# Altium PCB Z1.PcbDoc (part 2 of 2)
Units mm, origin at the board's own origin, x right, y up, seen from the top; angles counter-clockwise.
Board outline 56.7 x 34.49 mm, 4 copper layers (Top Layer, MidLayer1, MidLayer2, Bottom Layer), stack 1 mm thick; 106 components, 129 nets, 520 pads, 189 vias.
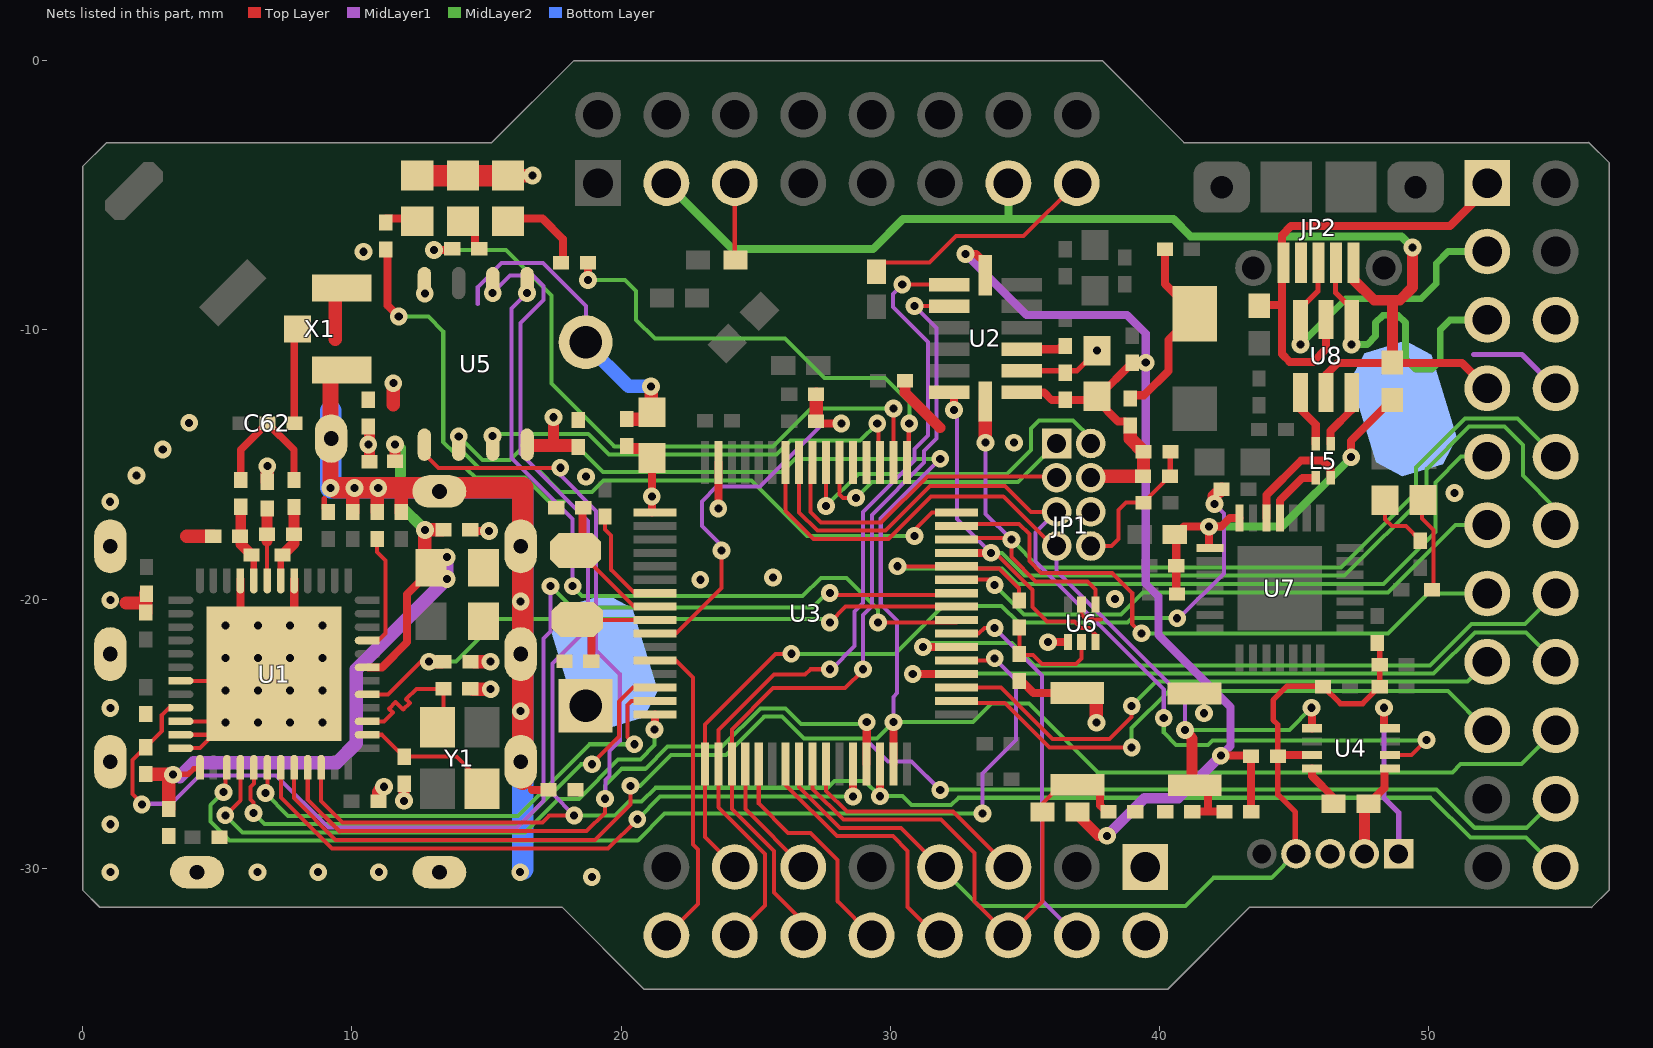
[diagram p4: the nets of this part, all layers, seen from the top]

## Via types
v1: diameter 0.66, hole 0.3, Top Layer to Bottom Layer, 171 vias
v2: diameter 0.66, hole 0.3, Top Layer to Bottom Layer, tented top, 17 vias
v3: diameter 0.66, hole 0.3, Top Layer to Bottom Layer, tented bottom, 1 vias

## Nets (pads, with @x,y where several pads share a name; then routed paths per layer and width w, separated by ;. In a path a pad name is that pad's centre, name@x,y a point inside that pad or via, vN(x,y) a via of type N, cw(c..) or ccw(c..) an arc to the next point about the centre after c; other vN are vias at no path point) (continued)
D+3V: BT1.1 C2.2 C3.2 C9.2 C14.2 C16.1 C24.1 C25.1 C26.1 C28.2 DS1.1 DS2.1 DS3.1 JP1.22 JP1.40 JP1.56 JP1.63 JP1.68 L2.1 L3.2 L10.2 R2.1 R9.2 R13.1 U2.1 U2.7 U3.1 U4.1 U5.8 | length 64.8
  Top Layer w0.3: C25.1@20.79,-14.408 C25.1@21.14,-14.758 v1(21.14,-16.188) U3.1@21.14,-16.778 ; v1(32.79,-7.178) 33.18,-7.178 33.527,-7.525 U2.7@33.527,-7.976 ; U2.1@34.87,-12.318 35.7,-12.318 35.993,-12.611 36.5,-12.611 C2.2@37.289,-12.611 ; C2.2@37.67,-12.61 38.456,-13.396 L3.2@38.719,-13.396 ; C2.2@37.701,-12.5 L10.2@38.983,-11.218 ; v1(42.27,-25.812) R13.1@43.367,-25.812 ; R13.1@43.39,-25.835 43.39,-27.877 R9.2@43.4,-27.887 ; C28.2@47.75,-27.6 48.34,-27.01 U4.1@48.34,-26.303
  Top Layer w0.4: C14.2@10.6,-13.592 10.65,-13.642 10.65,-14.255 L2.1@10.65,-14.9 ; 17.492,-14.28 v1(17.492,-13.244) ; C26.1@20.332,-14.408 C25.1@20.79,-14.408 ; R2.1@37.04,-27.9 37.04,-28.098 37.73,-28.788 v1(38.04,-28.788) ; JP1.56@47.6,-29.458 47.6,-27.977
  Top Layer w0.5: DS3.1@15.8,-4.268 v1(16.71,-4.268) ; U5.8@16.51,-14.293 C9.2@18.4,-14.293 ; JP1.68@18.36,-24.343 JP1.68@18.69,-24.013 ; JP1.63@37.528,-15.432 C16.1@39.382,-15.432 ; C2.2@37.631,-12.571 C2.2@37.701,-12.5 ; L3.2@38.913,-13.548 38.913,-14.047 C24.1@39.398,-14.532 C16.1@39.398,-15.426
  Top Layer w0.8: DS1.1@12.966,-4.268 DS2.1@14.13,-4.268 DS3.1@15.8,-4.268
  MidLayer1 w0.3: v1(32.79,-7.178) 35.054,-9.442 38.784,-9.442 39.48,-10.138 v1(39.48,-11.218) 39.48,-19.428 39.96,-19.908 39.96,-21.334 42.627,-24.001 42.627,-25.455 v1(42.27,-25.812)
  MidLayer1 w0.4: v1(38.04,-28.788) 39.433,-27.395 40.687,-27.395 v1(42.27,-25.812)
  MidLayer2 w0.15: 14.28,-15.178 14.587,-15.485 16.43,-15.485 17.323,-16.378 17.88,-16.378
  other v1: 10.611,-14.255
D_N: JP1.21 JP2.2 U8.1 | length 12.2
  Top Layer w0.2: JP2.2@46.53,-7.448 46.53,-7.5 46.53,-8.614 47.12,-9.204 47.12,-9.618 v1(47.12,-10.538)
  MidLayer2 w0.254: v1(47.12,-10.538) 47.708,-10.538 48.018,-10.228 48.018,-9.724 48.283,-9.459 48.85,-9.459 49.122,-9.731 49.122,-11.079 49.493,-11.45 50.111,-11.45 50.42,-11.141 50.42,-9.979 50.771,-9.628 JP1.21@52.16,-9.628
D_P: JP1.19 JP2.3 U8.3 | length 12.2
  Top Layer w0.2: v1(45.23,-10.538) U8.3@45.23,-9.618 45.23,-9.214 45.88,-8.564 45.88,-7.5 JP2.3@45.88,-7.448
  MidLayer2 w0.254: v1(45.23,-10.538) 46.924,-8.844 49.709,-8.844 50.269,-8.284 50.269,-7.527 50.708,-7.088 JP1.19@52.16,-7.088
DGND: BT1.2 C1.2 C2.1 C3.1 C7.1 C8.1 C9.1 C14.1 C16.2 C20.2 C21.2 C24.2 C25.2 C26.2 C28.1 JP1.24 JP1.39 JP1.57 JP1.67 JP1.69 L7.1 L8.2 L9.2 S1.2 S2.2 U2.2 U3.63 U4.8 U5.4 U6.2 U6.4 | length 35.4
  Top Layer w0.15: U6.2@37.1,-20.199 37.1,-20.578 37.27,-20.748 37.81,-20.748 ; JP1.67@37.44,-18.028 38.21,-18.028 38.469,-17.769 38.469,-16.694 38.75,-16.413 L9.2@39.4,-16.413 40.156,-15.657 C16.2@40.156,-15.568 ; C16.2@40.398,-15.416 C16.2@40.456,-15.432
  Top Layer w0.2: U2.2@34.87,-11.518 36.5,-11.518 36.92,-11.518 v1(37.67,-10.768) ; C16.2@40.398,-15.416 C24.2@40.398,-14.532
  Top Layer w0.3: v1(23.61,-16.638) U3.63@23.61,-14.929 ; C21.2@34.861,-23.029 35.317,-23.485 S1.2@36.937,-23.485 ; v1(35.85,-21.596) U6.4@36.575,-21.596 ; U4.8@45.65,-26.293 45.65,-26.564 C28.1@46.442,-27.356
  Top Layer w0.4: L8.2@30.54,-11.895 30.54,-12.338 31.84,-13.638
  Top Layer w0.5: 11.54,-12.784 v1(11.54,-11.978) ; C26.2@20.24,-13.316 20.882,-13.316 C25.2@21.11,-13.088 ; C25.2@21.11,-13.058 v2(21.11,-12.098) ; S1.2@37.64,-23.532 37.65,-23.542 v1@37.65,-24.518
  MidLayer1 w0.15: 14.675,-9.046 14.675,-8.403 15.56,-7.518 17.09,-7.518 18.69,-9.118 18.69,-10.458 JP1.69@18.69,-10.513
  MidLayer1 w0.2: 51.658,-10.916 53.448,-10.916 JP1.24@54.7,-12.168
  Bottom Layer w0.5: JP1.69@18.69,-10.513 20.275,-12.098 v2(21.11,-12.098)
  other v1: 18.91,-30.318 37.65,-24.588 41.64,-24.238 38.34,-19.998 22.94,-19.278 25.64,-19.198 50.947,-16.058 18.69,-15.452 34.59,-14.188 12.709,-8.65
DP+5V: C17.1 C18.1 C19.1 L4.2 U7.7 U7.8 | length 14.7
  Top Layer w0.3: C17.1@40.614,-19.808 40.614,-17.598 40.904,-17.308 v1(41.83,-17.308) ; U7.8@41.83,-18.092 v1(41.83,-17.308) ; U7.7@42.96,-16.992 42.6,-16.992 42.285,-17.308 v1(41.83,-17.308) ; v1@47.096,-14.733 47.096,-14.122 L4.2@48.64,-12.578
  MidLayer2 w0.3: v1(41.83,-17.308) 44.541,-17.308 v1@47.121,-14.728
  other v1: 47.11,-14.727
DRF+3V: C13.1 C251.1 C431.2 L2.2 R5.1 U1.25 U1.43 | length 28.8
  Top Layer w0.2: v1@3.359,-26.498 3.93,-26.498 4.128,-26.3 U1.25@4.36,-26.3
  Top Layer w0.3: U1.43@10.625,-22.535 11.113,-22.535 12.05,-21.598 12.05,-19.818 C431.2@12.597,-19.271
  Top Layer w0.4: L2.2@11.6,-14.887 v1(11.6,-14.255)
  Top Layer w0.5: R5.1@2.341,-26.498 3.359,-26.498 3.2,-26.657 C251.1@3.2,-27.79 ; C431.2@12.712,-18.232 12.712,-17.418 C13.1@13.362,-17.418
  MidLayer1 w0.5: v1@3.61,-26.59 4.127,-26.073 9.44,-26.073 10.17,-25.343 10.17,-22.609 v1(13.526,-19.253) v1@13.526,-18.584
  MidLayer2 w0.4: v1@11.6,-14.192 11.802,-14.394 11.8,-16.516 v1(12.712,-17.428)
  other v1: 3.359,-26.517 13.526,-18.442
DRFGND: C11.1 C13.2 C42.2 C71.2 C81.1 C101.1 C171.2 C251.2 C261.2 C351.2 C371.2 C381.2 C391.2 C431.1 C441.2 C481.2 L7.2 pad.0 R1.1 R451.2 U1.0 U1.5 U1.9 U1.19 U1.22 U1.23 U1.24 X1.2 | length 66.6
  Top Layer w0.15: U1.24@3.785,-25.535 4.362,-25.535 4.721,-25.176 U1.0@4.721,-25.035 ; U1.23@3.785,-25.035 U1.0@4.721,-25.035 ; U1.22@3.785,-24.535 U1.0@5.261,-24.535 ; U1.19@3.785,-23.035 4.961,-23.035 v2(5.31,-23.385) ; v2(5.31,-24.585) 4.861,-25.035 U1.0@4.721,-25.035 ; U1.0@5.42,-24.528 U1.0@5.47,-24.578 ; U1.0@5.86,-20.665 U1.0@5.868,-20.673
  Top Layer w0.154: U1.0@7.86,-20.477 U1.0@7.867,-20.484
  Top Layer w0.2: C481.2@8.978,-16.62 8.978,-16.263
  Top Layer w0.3: U1.0@5.86,-20.665 U1.9@5.86,-19.27 ; U1.0@7.86,-20.477 U1.5@7.86,-19.27 ; C13.2@14.362,-17.468 v1(15.09,-17.468) ; 16.683,-27.08 L7.2@17.3,-27.08
  Top Layer w0.4: v1(11.941,-27.488) C381.2@11.941,-26.852
  Top Layer w0.5: 1.626,-20.142 2.34,-20.142 ; C101.1@2.34,-20.5 2.34,-20.142 ; C351.2@2.34,-19.8 2.34,-20.142 ; 3.862,-17.66 C81.1@4.852,-17.66 ; C71.2@6.86,-15.638 v1@6.86,-15.06 ; 9.38,-10.348 9.38,-8.684 X1.2@9.625,-8.439 ; C171.2@10.032,-16.768 v1@10.032,-15.88 ; R451.2@10.936,-16.76 10.936,-15.972 v1@10.94,-15.968 ; C371.2@10.992,-27.498 10.992,-27.162 v1(11.189,-26.965) ; C441.2@11.841,-16.768 11.841,-15.879 ; C391.2@14.508,-23.342 v3(15.156,-23.342) ; R1.1@14.536,-22.322 v1(15.146,-22.322)
  Top Layer w0.6: v1(9.21,-15.868) X1.2@9.21,-11.741
  Top Layer w0.8: v1@9.373,-15.868 11.83,-15.868 16.34,-15.868 16.34,-20.133 16.34,-24.158 pad.0@16.34,-26.681
  Bottom Layer w0.8: 9.21,-13.003 v1(9.21,-15.868) 11.83,-15.868 16.34,-15.868 v1@16.34,-30.038
  other v1: 1.03,-30.138 6.5,-30.138 8.75,-30.138 11,-30.138 16.25,-30.138 1.03,-28.358 16.27,-24.158 1.03,-24.038 16.27,-20.091 1.03,-20.038 1.026,-16.382 10.095,-15.868 10.98,-15.868 2.007,-15.411 6.861,-15.06 2.978,-14.44 3.958,-13.453 10.43,-7.098
  other v2: 6.51,-24.585 7.71,-24.585 8.91,-24.585 6.51,-23.385 7.71,-23.385 8.91,-23.385 5.31,-22.185 6.51,-22.185 7.71,-22.185 8.91,-22.185 5.31,-20.985 6.51,-20.985 7.71,-20.985 8.91,-20.985
FLASH_CS: U3.40 U5.1 | length 27.9
  Top Layer w0.15: v1@29.54,-20.859 U3.40@32.46,-20.859
  MidLayer1 w0.15: v1@16.5,-8.633 15.931,-9.202 15.931,-14.751 18.2,-17.021 v1@18.2,-19.548 ; v1@16.623,-8.751 16.74,-8.633 v1@16.74,-8.613
  MidLayer2 w0.15: v1@18.2,-19.548 18.54,-19.888 26.74,-19.888 27.416,-19.212 28.374,-19.212 29.54,-20.378 v1(29.54,-20.868)
  other v1: 18.2,-19.518 16.505,-8.633
FLASH_HOLD: U3.51 U5.7 | length 16.6
  Top Layer w0.15: v1@29.555,-13.478 29.555,-14.874 U3.51@29.61,-14.929
  MidLayer2 w0.15: v1(15.22,-13.941) 15.3,-13.861 18.779,-13.861 19.542,-14.624 25.77,-14.624 26.282,-14.112 28.877,-14.112 v1(29.511,-13.478)
GP0/ICSPDAT: JP1.45 JP1.58 R13.2 R23.2 R24.2 R25.2 R26.2 U3.24 U4.7 | length 35.5
  Top Layer w0.15: U3.24@26.61,-26.129 26.61,-26.97 28.134,-28.494 30.386,-28.494 JP1.45@31.84,-29.948
  Top Layer w0.2: JP1.58@45.039,-29.449 45.039,-27.907 44.39,-27.258 R13.2@44.39,-25.835 44.39,-24.664 44.21,-24.484 44.21,-23.751 44.73,-23.231 R24.2@46.057,-23.231 ; R24.2@46.07,-23.244 46.707,-23.881 47.533,-23.881 R25.2@48.17,-23.244 R26.2@48.17,-22.444 48.17,-21.718 R23.2@48.083,-21.631
  Top Layer w0.3: R13.2@44.5,-25.793 U4.7@45.65,-25.793
  MidLayer2 w0.15: JP1.45@31.84,-29.948 33.29,-31.398 40.95,-31.398 42.002,-30.346 44.142,-30.346 45.039,-29.449 JP1.58@45.045,-29.443
GP2/T0CKI: C20.1 JP1.66 R9.1 S2.1 U3.58 U4.5 | length 32.1
  Top Layer w0.15: U3.58@26.11,-14.929 26.11,-16.721 27.147,-17.758 29.934,-17.758 31.504,-16.188 34.19,-16.188 JP1.66@35.77,-17.768 ; S2.1@41.196,-26.868 S2.1@41.203,-26.861 ; v1(45.64,-24.031) v1@45.65,-24.041
  Top Layer w0.3: C20.1@41.221,-27.887 41.8,-27.887 ; S2.1@41.8,-26.828 41.8,-27.887 ; R9.1@42.4,-27.887 41.8,-27.887 ; U4.5@45.65,-24.793 v1@45.65,-24.041
  Top Layer w0.4: v1(40.942,-24.856) 41.2,-25.174 S2.1@41.2,-26.83
  MidLayer1 w0.15: JP1.66@36.17,-18.028 36.17,-18.955 40.942,-23.728 v1(40.942,-24.856)
  MidLayer2 w0.15: v1(40.942,-24.856) 44.815,-24.856 v1(45.64,-24.031)
GP3/M\C\L\R\/VPP: JP1.55 U4.4 | length 6.2
  Top Layer w0.3: U4.4@48.33,-24.788 v1@48.33,-24.118
  MidLayer1 w0.2: v1@48.33,-24.118 48.33,-27.388 48.87,-27.928 JP1.55@48.87,-29.458
  other v1: 48.33,-24.031
GP5/OSC1/CLKIN: JP1.64 U3.57 U4.2 | length 35
  Top Layer w0.15: U3.57@26.61,-14.929 26.61,-16.781 27.287,-17.458 29.81,-17.458 31.474,-15.794 34.256,-15.794 35.22,-16.758 JP1.64@36.17,-16.758 ; U4.2@48.55,-25.793 49.345,-25.793 v1(49.906,-25.232)
  MidLayer1 w0.15: JP1.64@36.23,-16.678 36.16,-16.748 35.386,-17.522 35.386,-18.595 40.15,-23.359 v1(40.15,-24.418)
  MidLayer2 w0.15: v1(40.15,-24.418) 40.15,-24.959 40.602,-25.411 41.8,-25.411 41.959,-25.252 v1@49.906,-25.252
I2C.SCL: JP1.26 U2.14 U3.46 U6.1 | length 36.4
  Top Layer w0.15: U3.46@32.515,-17.724 34.316,-17.724 v1(34.492,-17.791) 34.492,-18.443 35.388,-19.338 37.31,-19.338 37.608,-19.636 U6.1@37.608,-20.199
  Top Layer w0.5: U2.14@33.527,-12.661 33.527,-14.035 v1(33.53,-14.188)
  MidLayer1 w0.15: v1(33.53,-14.188) 33.53,-16.829 v1(34.492,-17.791)
  MidLayer2 w0.15: v1(34.492,-17.791) 35.521,-18.82 46.734,-18.82 49.521,-16.033 49.521,-15.113 51.345,-13.289 53.281,-13.289 JP1.26@54.7,-14.708
I2C.SDA: JP1.28 U2.13 U3.45 U6.6 | length 40.2
  Top Layer w0.15: v1@33.907,-18.288 35.27,-19.651 35.27,-20.298 35.81,-20.838 36.84,-20.838 37.07,-21.068 37.37,-21.068 37.608,-21.306 U6.6@37.608,-21.596
  Top Layer w0.3: U2.13@32.364,-12.323 v1(32.364,-12.972) v1@32.4,-13.008 ; U3.45@32.46,-18.279 v1(33.73,-18.279)
  MidLayer1 w0.15: v1(32.364,-12.972) 32.475,-13.083 32.475,-17.024 v1(33.73,-18.279)
  MidLayer2 w0.15: v1(33.73,-18.279) 34.137,-18.279 34.987,-19.128 46.863,-19.128 49.901,-16.09 49.901,-15.176 51.486,-13.591 52.807,-13.591 53.486,-14.27 53.486,-15.413 54.7,-16.627 JP1.28@54.7,-17.248
INT1: JP1.52 U2.8 U3.18 | length 32.1
  Top Layer w0.15: JP1.52@24.22,-32.488 25.34,-31.368 25.34,-29.458 23.61,-27.728 U3.18@23.61,-26.129 23.61,-24.857 25.668,-22.799 26.83,-22.799 27.026,-22.603 v1@27.814,-22.603 ; v1(30.44,-8.318) U2.8@32.184,-8.318
  MidLayer1 w0.15: v1@27.814,-22.603 28.67,-21.747 28.67,-20.46 28.985,-20.145 28.985,-16.758 30.891,-14.852 30.891,-14.427 31.39,-13.928 31.39,-10.448 30.09,-9.148 30.09,-8.668 v1(30.44,-8.318)
  other v1: 27.75,-22.603
INT2: JP1.50 U2.9 U3.19 | length 31
  Top Layer w0.15: JP1.50@26.76,-31.978 25.67,-30.888 25.67,-29.347 24.11,-27.787 U3.19@24.11,-26.129 24.11,-24.841 25.645,-23.306 28.317,-23.306 v1@28.977,-22.645 ; v1(30.89,-9.118) U2.9@32.32,-9.118
  Top Layer w0.2: JP1.50@26.76,-32.488 JP1.50@26.76,-31.978
  MidLayer1 w0.15: v1@28.977,-22.645 28.977,-20.581 29.31,-20.248 29.31,-16.868 31.251,-14.927 31.251,-14.497 31.71,-14.038 31.71,-9.938 v1(30.89,-9.118)
  other v1: 28.977,-22.603
JP1NC6: JP1.65
JP.INT_P1.0/CAOUT: JP1.54 U3.12 | length 11.8
  Top Layer w0.15: U3.12@21.26,-22.279 22.033,-22.279 22.67,-22.916 22.67,-29.109 22.853,-29.292 22.853,-31.315 JP1.54@21.68,-32.488
JP.P1.5/TA0: JP1.51 R14.2 U3.17 | length 31.3
  Top Layer w0.15: JP1.51@24.22,-29.948 23.11,-28.838 U3.17@23.11,-26.129 23.11,-24.654 25.736,-22.028 v1(26.32,-22.028)
  Top Layer w0.5: v1(42.03,-16.463) 42.03,-16.183 R14.2@42.3,-15.913
  MidLayer1 w0.15: v1@40.72,-20.708 42.385,-19.043 42.385,-16.818 v1(42.03,-16.463)
  MidLayer2 w0.15: v1(26.32,-22.028) 30.168,-22.028 31.948,-20.248 34.125,-20.248 34.749,-20.872 38.801,-20.872 38.965,-20.708 v1@40.72,-20.708
  other v1: 40.648,-20.708
JP.P2.0/ACLK/CA2: JP1.49 U3.20 | length 4.7
  Top Layer w0.15: U3.20@24.621,-26.118 U3.20@24.61,-26.129 24.61,-27.798 JP1.49@26.76,-29.948
JP.P2.1/TAINCLK/CA3: JP1.48 U3.21 | length 8.6
  Top Layer w0.15: U3.21@25.11,-26.129 25.11,-27.591 26.197,-28.678 27.025,-28.678 28.03,-29.683 28.03,-31.218 JP1.48@29.3,-32.488
JP.P2.3/CA0/TA1: JP1.46 U3.23 | length 10
  Top Layer w0.15: U3.23@26.11,-26.129 26.11,-26.898 28.01,-28.798 30.09,-28.798 30.64,-29.348 30.64,-31.428 JP1.46@31.77,-32.558
  Top Layer w0.2: JP1.46@31.77,-32.558 JP1.46@31.78,-32.568
JP.P2.6/ADC12CLK/DMAEO/CA6: JP1.43 U3.26 | length 8.9
  Top Layer w0.15: U3.26@27.61,-26.129 27.61,-27.118 28.38,-27.888 32.32,-27.888 JP1.43@34.38,-29.948
JP.P4.0/TB0: JP1.32 U3.36 | length 26.6
  Top Layer w0.3: v1(30.83,-22.778) U3.36@32.46,-22.779
  MidLayer2 w0.15: v1(30.83,-22.778) 30.846,-22.762 50.169,-22.762 51.701,-21.23 53.602,-21.23 JP1.32@54.7,-22.328
JP.P4.2/TB2: JP1.30 U3.38 | length 26.2
  Top Layer w0.15: v1@31.17,-21.779 v1(31.21,-21.779)
  Top Layer w0.3: v1(31.21,-21.779) U3.38@32.46,-21.779
  MidLayer2 w0.15: v1@31.21,-21.628 34.52,-21.628 35.354,-22.462 50.039,-22.462 51.573,-20.928 53.56,-20.928 JP1.30@54.7,-19.788
JP.P4.3/TB3: JP1.42 U3.39 | length 14.2
  Top Layer w0.15: U3.39@32.46,-21.279 33.279,-21.279 33.49,-21.068 v1(33.87,-21.068)
  MidLayer1 w0.15: v1(33.87,-21.068) 35.63,-22.828 35.63,-31.198 JP1.42@36.92,-32.488
JP.P4.7/TBCLK: JP1.27 U3.43 | length 21.7
  Top Layer w0.15: U3.43@32.46,-19.276 33.669,-19.277 v1(33.87,-19.478) ; v1@33.9,-19.448 v1@33.93,-19.478
  MidLayer2 w0.15: v1(33.87,-19.478) 34.964,-20.572 38.556,-20.572 39.374,-19.754 48.482,-19.754 50.988,-17.248 JP1.27@52.16,-17.248
JP.P5.3/UCB1CLK/UCA1STE: JP1.29 U3.47 | length 23.3
  Top Layer w0.15: U3.47@32.46,-17.279 32.531,-17.208 34.778,-17.208 35.157,-17.586 35.157,-18.585 35.593,-19.021 38.237,-19.021 38.98,-19.764 38.98,-20.928 v1(39.32,-21.268)
  MidLayer2 w0.15: v1@39.32,-21.272 48.471,-21.272 49.955,-19.788 JP1.29@52.16,-19.788
JTAG.TDI: JP1.61 U3.55 | length 13.5
  Top Layer w0.15: v1(27.61,-16.538) U3.55@27.61,-14.929
  MidLayer2 w0.15: v1(27.61,-16.538) 28.816,-15.352 34.336,-15.352 35.22,-14.468 35.22,-13.661 35.524,-13.357 36.779,-13.357 JP1.61@37.44,-14.018
JTAG.TDO: JP1.60 U3.54 | length 10.1
  Top Layer w0.15: U3.54@28.11,-14.929 28.11,-16.118 28.24,-16.248 v1@28.72,-16.248
  MidLayer2 w0.15: v1(28.72,-16.238) 29.316,-15.652 34.736,-15.652 JP1.60@36.17,-14.218
JTAG.TMS: JP1.62 U3.56 | length 11.9
  Top Layer w0.15: U3.56@27.11,-14.929 27.03,-15.009 27.03,-16.768 27.42,-17.158 29.65,-17.158 31.37,-15.438 36.02,-15.438 JP1.62@36.17,-15.288
LED1: R6.1 U3.48 | length 29.9
  Top Layer w0.15: v1(30.89,-17.658) 30.89,-17.428 31.539,-16.779 U3.48@32.46,-16.779
  Top Layer w0.3: R6.1@11.33,-7.168 11.33,-9.098 v1(11.74,-9.508)
  MidLayer2 w0.15: v1(11.74,-9.508) 12.838,-9.508 13.393,-10.063 13.393,-14.161 13.821,-14.589 14.181,-14.589 14.724,-15.132 16.856,-15.132 17.737,-16.013 18.916,-16.013 19.341,-15.588 24.834,-15.588 26.904,-17.658 v1(30.89,-17.658)
LED2: R7.2 U3.50 | length 25.3
  Top Layer w0.15: U3.50@30.11,-14.929 v1(30.11,-12.918)
  Top Layer w0.3: v1(13.047,-7.031) R7.2@13.73,-7.031
  MidLayer2 w0.15: v1(13.047,-7.031) 15.723,-7.031 17.41,-8.718 17.41,-11.988 19.744,-14.322 25.639,-14.322 27.044,-12.918 v1(30.11,-12.918)
LED3: R8.2 U3.49 | length 17.4
  Top Layer w0.15: U3.49@30.61,-14.929 30.68,-14.859 v1@30.68,-13.478
  Top Layer w0.3: v1(18.77,-8.145) R8.2@18.77,-7.505 ; R8.2@18.834,-7.481 R8.2@18.841,-7.488
  MidLayer2 w0.15: v1(18.77,-8.145) 20.142,-8.145 20.558,-8.561 20.558,-9.626 21.26,-10.328 26.09,-10.328 27.544,-11.782 29.794,-11.782 30.7,-12.688 v1(30.7,-13.478)
NCID: JP2.4
NetC15_1: C15.1 D1.2 L3.1 | length 7.1
  Top Layer w0.3: L3.1@38.991,-12.427 39.421,-12.427 40.32,-11.528 40.32,-10.38 D1.2@41.3,-9.4 40.192,-8.292 C15.1@40.192,-7
NetC21_1: C21.1 R17.1 U6.5 | length 4.1
  Top Layer w0.15: R17.1@34.787,-21.098 34.787,-22.077 35.289,-22.077 35.62,-22.408 36.897,-22.408 37.1,-22.205 U6.5@37.1,-21.596
NetC61_2: C61.2 C62.1 L81.1 | length 5
  Top Layer w0.278: L81.1@5.871,-15.57 5.871,-14.458 C62.1@6.864,-13.465 7.851,-14.452 C61.2@7.851,-15.578
NetC71_1: C71.1 L62.1 U1.7 | length 2.6
  Top Layer w0.15: U1.7@6.851,-19.24 L62.1@6.851,-17.838
  Top Layer w0.4: L62.1@6.851,-17.838 C71.1@6.851,-16.638
NetDS1_2: DS1.2 R6.2 | length 1.1
  Top Layer w0.3: R6.2@11.257,-5.868 DS1.2@12.39,-5.868
NetDS2_2: DS2.2 R7.1 | length 1.3
  Top Layer w0.3: DS2.2@14.13,-5.968 14.58,-6.418 14.58,-6.831 R7.1@14.73,-6.981
NetDS3_2: DS3.2 R8.1 | length 3.3
  Top Layer w0.3: DS3.2@15.8,-6.018 15.95,-5.868 17.08,-5.868 17.834,-6.622 R8.1@17.834,-7.481
NetDS4_2: DS4.2 R4.1 | length 3.5
  Top Layer w0.15: DS4.2@49.74,-16.318 49.74,-17.001 50.17,-17.431 R4.1@50.17,-19.644
NetDS5_2: DS5.2 R3.1 | length 2.3
  Top Layer w0.15: DS5.2@48.37,-16.331 48.37,-17.039 48.622,-17.291 49.143,-17.291 R3.1@49.683,-17.831
NetJP1_5: JP1.5 R15.1 | length 2.9
  Top Layer w0.154: R15.1@24.22,-7.4 JP1.5@24.22,-4.548
NetJP1_15: JP1.15 R21.1 | length 8.9
  Top Layer w0.15: R21.1@29.47,-7.868 29.47,-7.843 29.47,-7.702 29.677,-7.495 31.451,-7.495 32.428,-6.518 34.95,-6.518 JP1.15@36.92,-4.548
NetL5_1: L5.1 U8.6 | length 2.2
  Top Layer w0.3: L5.1@46.345,-14.223 46.345,-13.753 47.13,-12.968 U8.6@47.13,-12.318
NetL5_2: L5.2 U7.5 | length 4.2
  Top Layer w0.3: U7.5@43.96,-16.992 43.96,-16.137 45.239,-14.858 46.05,-14.858 46.345,-15.153 L5.2@46.345,-15.493
NetL5_3: L5.3 U7.4 | length 2.3
  Top Layer w0.3: U7.4@44.46,-16.992 44.46,-16.336 45.303,-15.493 L5.3@45.795,-15.493
NetL5_4: L5.4 U8.4 | length 2.1
  Top Layer w0.3: U8.4@45.23,-12.318 45.23,-12.948 45.795,-13.513 L5.4@45.795,-14.223
NetR22_1: R22.1 U2.3 | length 1.5
  Top Layer w0.3: U2.3@34.87,-10.718 36.257,-10.718 R22.1@36.357,-10.618
NetR451_1: R451.1 U1.45 | length 4.4
  Top Layer w0.15: U1.45@10.625,-21.535 10.991,-21.535 11.25,-21.276 ; R451.1@10.936,-17.76 10.936,-18.244 11.251,-18.559 11.251,-21.276
P1.2/TA1: U1.29 U3.14 | length 19.7
  Top Layer w0.15: v1(6.35,-27.938) 6.35,-27.548 6.235,-27.433 6.235,-26.969 6.36,-26.844 U1.29@6.36,-26.3 ; v1(18.915,-26.131) 18.98,-26.038 19.926,-25.092 19.926,-23.795 20.442,-23.279 U3.14@21.26,-23.279
  MidLayer2 w0.15: v1(6.35,-27.938) 6.764,-28.352 16.283,-28.352 18.504,-26.131 v1(18.915,-26.131)
P1.3/TA2: U1.30 U3.15 | length 18.6
  Top Layer w0.15: v1@6.86,-27.06 U1.30@6.86,-26.3 ; v1(20.49,-25.388) 20.23,-25.128 20.23,-23.938 20.389,-23.779 U3.15@21.26,-23.779
  MidLayer1 w0.15: v1@6.84,-27.053 v1@6.843,-27.056
  MidLayer2 w0.15: v1(6.79,-27.198) 7.636,-28.044 16.162,-28.044 18.819,-25.388 v1(20.49,-25.388)
P1.4/SMCLK: U1.28 U3.16 | length 20.7
  Top Layer w0.15: v1(5.3,-28.028) 5.86,-27.468 U1.28@5.86,-26.3
  Top Layer w0.3: v1(21.24,-24.838) 21.26,-24.818 U3.16@21.26,-24.279
  MidLayer2 w0.15: v1(5.3,-28.028) 5.931,-28.659 16.428,-28.659 17.674,-27.413 18.43,-27.413 19.891,-25.952 20.711,-25.952 21.24,-25.423 v1(21.24,-24.838)
P2.5/ROSC/CA5: C1.1 JP1.44 R2.2 S1.1 U3.25 | length 19.3
  Top Layer w0.15: U3.25@27.11,-26.129 27.11,-27.045 28.253,-28.188 31.875,-28.188 33.12,-29.433 33.12,-31.228 JP1.44@34.38,-32.488 35.647,-31.221 35.647,-27.581 36.337,-26.891 S1.1@36.943,-26.891
  Top Layer w0.3: S1.1@37.79,-27.148 37.79,-27.668 C1.1@37.98,-27.858
P3.0/UCB0STE/UCA0CLK: U1.31 U3.28 | length 25.2
  Top Layer w0.15: U1.31@7.36,-26.3 7.36,-27.358 9.26,-29.258 19.515,-29.258 v1(20.6,-28.173)
  Top Layer w0.3: v1@28.61,-27.438 U3.28@28.61,-26.129
  MidLayer2 w0.15: v1(20.6,-28.173) 21.445,-27.328 v1(28.61,-27.328)
P3.1/UCB0SIMO/UCB0SDA: JP1.36 U1.33 U3.29 U5.5 | length 73.9
  Top Layer w0.15: U1.33@8.36,-26.3 8.361,-27.439 9.541,-28.619 18.707,-28.618 19.397,-27.934 v1(19.4,-27.413) ; U5.5@12.695,-14.263 12.695,-14.603 13.22,-15.128 17.661,-15.128 v1@17.74,-15.207
  Top Layer w0.3: U3.29@29.11,-26.129 v1@29.12,-24.538
  MidLayer1 w0.15: v1(17.74,-15.121) 17.74,-15.398 19.062,-16.72 19.062,-21.899 19.948,-22.784 19.948,-25.267 19.57,-25.644 19.57,-26.558 19.411,-26.718 v1@19.411,-27.403 ; v1@29.12,-24.538 29.12,-25.235 29.91,-26.025 30.787,-26.025 v1(31.85,-27.088)
  MidLayer2 w0.15: v1(19.4,-27.413) 19.4,-26.92 20.022,-26.298 20.895,-26.298 21.713,-25.48 23.743,-25.48 25.17,-24.052 26.104,-24.052 26.68,-24.628 29.03,-24.628 v1@29.12,-24.538 ; v1@31.85,-27.075 50.285,-27.075 51.699,-28.489 53.619,-28.489 JP1.36@54.7,-27.408
  other v1: 29.12,-24.568
P3.2/UCB0SOMI/UCB0SCL: JP1.38 U1.34 U3.30 U5.2 | length 75
  Top Layer w0.15: U1.34@8.851,-26.3 8.851,-27.489 9.65,-28.288 17.076,-28.288 17.33,-28.034 v1(18.256,-28.034)
  Top Layer w0.3: v1(29.61,-27.318) U3.30@29.61,-26.129
  MidLayer1 w0.15: v1(15.23,-8.633) 15.875,-7.988 16.72,-7.988 17.11,-8.378 17.11,-8.898 16.26,-9.748 16.26,-14.588 18.762,-17.09 18.762,-21.07 17.443,-22.389 17.443,-27.221 v1(18.256,-28.034)
  MidLayer2 w0.15: v1(18.256,-28.034) 19.779,-28.034 20.295,-27.518 20.756,-27.518 21.27,-27.004 27.667,-27.004 27.923,-26.748 29.04,-26.748 v1(29.61,-27.318) 30.446,-27.318 30.78,-27.652 32.244,-27.652 32.521,-27.375 50.061,-27.375 51.543,-28.857 53.609,-28.857 JP1.38@54.7,-29.948
P3.3/UCB0CLK/UCA0STE: JP1.34 U1.32 U3.31 U5.6 | length 85
  Top Layer w0.15: U1.32@7.85,-26.3 7.85,-27.388 9.401,-28.939 19.025,-28.938 20.343,-27.619 v1(20.343,-26.933)
  Top Layer w0.3: U3.31@30.11,-26.129 v1(30.11,-24.568)
  MidLayer1 w0.15: v1(30.11,-24.568) 30.11,-23.631 30.25,-23.491 30.25,-20.788 29.64,-20.178 29.64,-16.998 31.843,-14.795 v1@31.843,-14.782
  MidLayer2 w0.15: v1(13.97,-13.953) 14.849,-14.832 15.879,-14.832 16.244,-14.467 18.511,-14.467 19.322,-15.278 25.968,-15.278 26.458,-14.788 v1(31.85,-14.788) ; v1(20.343,-26.933) 20.698,-26.933 21.851,-25.78 23.888,-25.78 25.315,-24.353 25.973,-24.353 26.797,-25.177 29.501,-25.177 v1(30.11,-24.568) 33.069,-24.568 33.756,-23.881 35.142,-23.881 37.699,-26.438 50.867,-26.438 51.177,-26.128 53.44,-26.128 JP1.34@54.7,-24.868
P4.1/TB1: U1.27 U3.37 | length 39.6
  Top Layer w0.15: v1(5.23,-27.168) 5.3,-27.098 U1.27@5.3,-26.548 ; U1.27@5.36,-26.408 U1.27@5.36,-26.3 U1.27@5.36,-26.11 ; U3.37@32.46,-22.279 v1@33.87,-22.279
  MidLayer1 w0.15: v1(33.421,-27.964) 33.421,-26.479 34.67,-25.231 34.67,-22.998 v1(33.87,-22.198)
  MidLayer2 w0.15: v1(5.23,-27.168) 4.745,-27.653 4.745,-28.258 5.448,-28.961 20.617,-28.961 21.61,-27.968 33.291,-27.968 v1(33.421,-27.964)
P4.5/TB5: R1.2 U1.41 U3.41 | length 23.8
  Top Layer w0.15: U1.41@10.59,-23.538 11.35,-23.538 12.566,-22.322 v1(12.866,-22.322) ; v1(27.75,-20.868) 28.339,-20.279 U3.41@32.46,-20.279
  Top Layer w0.5: v1(12.866,-22.322) R1.2@13.336,-22.322
  MidLayer2 w0.15: v1(12.866,-22.322) 13.862,-22.322 15.446,-20.738 27.62,-20.738 v1(27.75,-20.868)
P4.6/TB6: R5.2 U1.21 U3.42 | length 45.1
  Top Layer w0.15: v1@2.23,-27.598 1.86,-27.228 1.86,-25.979 2.94,-24.899 2.94,-24.308 3.213,-24.035 U1.21@3.785,-24.035 ; v1@27.65,-19.839 U3.42@32.38,-19.839
  MidLayer1 w0.15: v1@2.2,-27.598 3.285,-27.598 4.334,-26.549 7.191,-26.549 9.125,-28.482 16.14,-28.482 17.12,-27.502 17.12,-21.458 17.38,-21.198 v1(17.38,-19.518)
  MidLayer2 w0.15: v1(17.38,-19.518) 18.17,-20.308 27.11,-20.308 27.622,-19.796 v1@27.65,-19.823
  other v1: 2.2,-27.628 27.75,-19.768
P5.0/UCB1STE/UCA1CLK: JP1.25 R17.2 U3.44 | length 30.4
  Top Layer w0.15: v1(30.26,-18.779) U3.44@32.46,-18.779 ; U3.44@32.92,-18.858 34.04,-18.858 34.777,-19.595 R17.2@34.777,-20.048
  MidLayer2 w0.15: v1(30.26,-18.779) 30.349,-18.868 34.147,-18.868 34.717,-19.438 48.302,-19.438 50.233,-17.507 50.233,-15.669 51.194,-14.708 JP1.25@52.16,-14.708 JP1.25@52.16,-15.131
RF_N: C81.2 L61.1 L81.2 U1.8 | length 2.8
  Top Layer w0.25: U1.8@6.36,-19.27 L61.1@6.36,-18.442
  Top Layer w0.4: L81.2@5.871,-16.57 5.871,-17.953 L61.1@6.278,-18.36
RF_P: C61.1 L61.2 L62.2 U1.6 | length 2.8
  Top Layer w0.25: U1.6@7.36,-19.27 L61.2@7.36,-18.422
  Top Layer w0.4: L61.2@7.422,-18.36 7.851,-17.931 C61.1@7.851,-16.578
"U.FL ANTENNA": C62.2 X1.1 | length 3.5
  Top Layer w0.278: C62.2@7.864,-13.465 7.864,-10.074 X1.1@7.975,-9.963
UART1.RX: JP1.31 U3.35 | length 21.9
  Top Layer w0.15: U3.35@32.46,-23.279 34.101,-23.279 36.022,-25.2 38.143,-25.2 38.96,-24.384 v1(38.96,-23.968)
  MidLayer2 w0.15: v1(38.96,-23.968) 39.866,-23.062 51.426,-23.062 JP1.31@52.16,-22.328
UART1.TX: JP1.33 U3.34 | length 22.2
  Top Layer w0.15: U3.34@32.59,-23.848 34.246,-23.848 35.906,-25.508 v1(38.96,-25.508)
  MidLayer2 w0.15: v1(38.96,-25.508) 38.96,-24.788 40.337,-23.411 50.703,-23.411 JP1.33@52.16,-24.868
USB+5V: JP1.3 JP1.13 JP1.23 JP2.1 L4.1 U8.5 | length 45.3
  Top Layer w0.3: U8.5@46.18,-12.318 46.18,-11.664 46.609,-11.235 51.227,-11.235 JP1.23@52.16,-12.168
  Top Layer w0.4: JP2.1@47.19,-7.448 47.19,-8.125 47.965,-8.9 48.915,-8.9 49.39,-8.425 v1(49.39,-6.938) ; L4.1@48.64,-11.225 48.64,-8.9
  MidLayer2 w0.3: JP1.3@21.68,-4.548 24.13,-6.998 29.36,-6.998 30.47,-5.888 40.512,-5.888 41.151,-6.527 48.979,-6.527 v1(49.39,-6.938) ; 34.38,-5.868 JP1.13@34.38,-4.548
USBGND: JP1.17 JP2.5 L6.2 U8.2 | length 16.9
  Top Layer w0.3: L6.2@43.78,-9.075 44.525,-9.075 ; U8.2@46.18,-9.618 46.18,-10.707 45.702,-11.185 44.827,-11.185 44.535,-10.893 44.535,-6.493 44.88,-6.148 50.785,-6.148 JP1.17@52.14,-4.793
  Top Layer w0.4: JP1.17@52.14,-4.793 JP1.17@52.14,-4.438
USBNC0: 
USBNC1: 
VEREF+/DAC0: R10.1 R11.2 U3.10 | length 14.8
  Top Layer w0.15: U3.10@21.26,-21.279 22.028,-21.279 23.73,-19.577 v1(23.73,-18.188) ; R10.1@27.24,-13.401 R10.1@27.317,-13.478
  Top Layer w0.3: R10.1@27.317,-13.478 v1(28.177,-13.478)
  Top Layer w0.5: R10.1@27.24,-13.401 R11.2@27.24,-12.395
  MidLayer1 w0.15: v1@23.685,-17.973 23,-17.288 23,-16.368 23.55,-15.818 25.16,-15.818 27.5,-13.478 v1(28.177,-13.478)
VREF+: C27.2 U3.7 | length 4.1
  Top Layer w0.15: C27.2@19.4,-16.93 19.4,-17.418 19.62,-17.638 19.62,-18.907 20.492,-19.779 U3.7@21.26,-19.779
XIN: C7.2 U3.8 Y2.1 | length 5.2
  Top Layer w0.15: Y2.1@18.528,-18.323 20.484,-20.279 U3.8@21.26,-20.279
  Top Layer w0.3: Y2.1@18.569,-18.243 18.569,-18.197 C7.2@18.569,-16.6
XOSC16_N: C391.1 U1.39 Y1.1 | length 5.6
  Top Layer w0.15: U1.39@10.625,-24.535 11.195,-24.535 11.519,-24.212 11.377,-24.07 11.625,-23.823 11.766,-23.964 11.908,-24.106 12.155,-23.858 12.014,-23.717 12.399,-23.332 C391.1@13.398,-23.332 13.398,-24.552 Y1.1@13.189,-24.76
XOSC16_P: C381.1 U1.38 Y1.3 | length 5.1
  Top Layer w0.15: U1.38@10.625,-25.035 11.123,-25.035 C381.1@11.94,-25.852 ; C381.1@12.091,-25.846 13.885,-25.846 Y1.3@15.039,-27
XOUT: C8.2 U3.9 Y2.2 | length 5.2
  Top Layer w0.15: Y2.2@17.968,-21.16 Y2.2@18.37,-20.758 ; Y2.2@18.892,-21.301 18.37,-20.779 U3.9@21.26,-20.779
  Top Layer w0.3: C8.2@18.892,-22.3 Y2.2@18.892,-21.301
XT2IN: U3.53
XT2OUT: U3.52
pads on no net: JP2. JP2.6 JP2.7 L1.2 Y1.2 Y1.4

## Polygon pours and split planes (outlines as drawn)
DGND on Top Layer "Top=DGND" (solid, remove dead copper, pour order 1018): 9.23,-6.978 9.29,-7.038 9.29,-15.942 9.366,-16.018 16.42,-16.018 16.42,-35.708 16.4,-35.728 57.38,-35.728 57.38,-1.908 41.39,-1.908 41.39,-6.638 38.37,-9.658 33.919,-9.658 33.601,-9.976 33.601,-12.797 33.29,-13.108 29.27,-13.108 28.24,-14.138 26.04,-14.138 26.01,-14.168 26.01,-16.604 25.717,-16.897 24.709,-16.897 23.91,-16.098 23.83,-16.098 23.54,-15.808 23.45,-15.808 23.199,-16.059 23.199,-17.505 22.29,-18.414 22.29,-20.454 22.265,-20.429 20.68,-20.429 19.093,-18.842 19.093,-15.411 19.1,-12.63 18.253,-8.636 17.3,-7.682 17.3,-0.568
ADCGND on Top Layer "Top=AGND" (solid, remove dead copper, pour order 1008): 41.308,-3.501 41.308,-6.523 33.808,-14.023 24.783,-14.023 22.283,-16.523 22.283,-19.708 22.058,-19.933 20.668,-19.933 19.028,-18.293 19.028,-15.273 18.791,-15.036 18.791,-9.073 17.218,-7.5 17.218,-0.173 18.318,0.927 37.978,0.927
DRFGND on Top Layer "Top=RFGND" (solid, remove dead copper, pour order 1007): 0.739,-17.673 9.221,-9.3 9.231,-9.3 9.373,-9.44 9.373,-15.803 16.284,-15.803 16.588,-16.103 16.588,-16.123 16.72,-16.253 16.72,-30.788 16.457,-31.048 0.587,-31.048 0.202,-30.668 0.181,-30.668 0.09,-30.578 0.09,-18.294
DGND on Top Layer "Mid1=DGND" (solid, remove dead copper, pour order 1001): 17.742,-30.31 17.742,-35.34 20.33,-37.928 21.19,-38.788 57.73,-38.788 59.97,-36.548 59.97,-29.488
DGND on Top Layer "Top=DGND" (solid, remove dead copper, pour order 1003): 18.173,-8.486 18.71,-9.022 18.71,-11.588 18.07,-12.228 17.43,-12.228 17.601,-12.057 17.601,-7.913
DRFGND on Top Layer "Mid1=DGND" (solid, remove dead copper, pour order 1000): 0.56,-20.62 0.47,-20.53 0.47,-2.678 0.49,-2.698 18.29,-2.698
ADCGND on Top Layer "Top=AGND_2" (solid, pour order 1005): 24.418,-16.768 25.759,-16.768 26.28,-16.218 26.28,-14.128 23.972,-14.128 23.61,-14.51 23.61,-16.768
CPDGND on Top Layer "Top=PDGND" (solid, remove dead copper, pour order 1006): 40.88,-9.488 40.88,-11.668 39.85,-12.698 39.85,-20.428 42.1,-22.678 46.68,-22.678 46.82,-22.678 48.13,-21.368 48.14,-21.368 50.29,-19.218 50.29,-3.728 50.22,-3.798 40.88,-3.798
DGND on MidLayer1 "Mid1=DGND" (solid, remove dead copper, pour order 1000): 9.367,-4.959 9.367,-15.559 9.307,-15.619 15.697,-15.619 15.897,-15.419 15.877,-15.419 15.647,-15.649 16.637,-16.639 16.637,-31.719 22.007,-37.089 54.747,-37.089 59.927,-31.909 59.927,-1.479 58.927,-0.479 53.747,-0.479 52.044,-2.183 52.044,-6.136 50.244,-7.936 50.244,-9.508 47.024,-12.727 47.024,-21.737 45.902,-22.859 41.767,-22.859 39.577,-20.669 39.487,-20.669 39.548,-20.608 39.548,-13.054 39.544,-11.42 39.766,-10.775 38.238,-9.218 32.577,-9.219 29.297,-12.499 29.305,-12.5 28.012,-12.987 26.779,-13.943 25.137,-13.809 24.827,-14.119 24.827,-14.799 24.027,-15.599 23.437,-15.599 22.437,-16.599 22.437,-18.559 21.127,-19.869 19.737,-19.869 19.647,-19.779 19.647,-19.499 18.937,-18.789 18.937,-16.289 18.047,-15.399 18.047,-8.989 17.067,-8.009 17.067,2.241 16.597,2.711
CPDGND on MidLayer1 "Mid1=DPGND" (solid, remove dead copper, pour order 1009): 40.098,-2.838 39.815,-3.121 39.407,-9.363 39.433,-12.049 38.778,-12.702 38.778,-20.502 41.153,-22.876 46.047,-22.876 47.257,-21.666 47.257,-12.656 50.476,-9.437 50.476,-8.04 52.276,-6.24 52.276,-3.776 52.266,-3.786 41.287,-3.786 41.277,-3.776 41.107,-3.776 40.107,-2.777 40.107,-2.747
DRFGND on MidLayer1 "Mid1=RFGND" (solid, remove dead copper, pour order 1010): 0.812,-17.489 9.335,-8.962 9.345,-8.962 9.488,-9.105 9.488,-15.584 16.432,-15.584 16.738,-15.889 16.738,-15.91 16.87,-16.042 16.87,-30.843 16.605,-31.108 0.659,-31.108 0.272,-30.721 0.252,-30.721 0.16,-30.629 0.16,-18.12
ADCGND on MidLayer1 "Mid1=DGND" (solid, remove dead copper, pour order 1002): 17.22,0.802 17.22,-17.418 19.84,-20.038 21.34,-20.038 27.72,-13.658 31.34,-13.658 32.26,-12.738 32.26,-11.778 32.22,-11.738 32.723,-11.738 34.857,-9.604 39.024,-9.604 41.43,-7.198 41.43,2.392 41.6,2.562
DGND on MidLayer1 "Mid1=DGND" (solid, pour order 1003): 16.67,-7.248 18.69,-8.342 18.69,-11.382 16.776,-12.418 16.763,-12.418
DRFGND on MidLayer1 "Mid1=RFGND" (solid, remove dead copper, pour order 1002): 0.59,-19.789 0.5,-19.706 0.5,-3.368 0.52,-3.386 18.32,-3.386
D+3V on MidLayer2 "Mid2=D+3.3V" (solid, remove dead copper, pour order 1012): 41.02,-2.548 41.036,-2.564 41.036,-6.704 38.544,-9.196 32.996,-9.196 32.684,-9.508 32.613,-9.579 32.613,-10.81 29.204,-14.218 19.9,-14.218 18.74,-13.058 18.74,1.392 9.234,-8.114 9.234,-15.34 9.779,-15.886 15.21,-15.886 16.28,-16.956 16.21,-17.026 16.21,-33.518 18.99,-36.298 57.7,-36.298 57.7,-2.488 57.62,-2.408
D+1.8V on MidLayer2 "Mid2=D+1.8V" (solid, remove dead copper, pour order 1011): 5.21,-13.283 5.21,-19.753 5.15,-19.813 4.16,-19.813 4.16,-25.743 4.11,-25.793 10.29,-25.793 10.29,-19.813 10.31,-19.793 8.41,-19.793 8.36,-19.843 8.36,-10.233 9.32,-9.273 9.32,-9.183 9.45,-9.313 9.45,-15.763 9.63,-15.943 13.37,-15.943 15.26,-15.943 16.33,-17.013 16.33,-29.223 15.68,-29.873 1.7,-29.873 1.05,-29.223 1.05,-17.573 0.99,-17.513
ADC+3V on MidLayer2 "Mid1=DGND" (solid, remove dead copper, pour order 1004): 16.768,0.545 16.768,-12.015 20.085,-15.355 28.917,-15.355 34.053,-10.185 37.549,-10.185 40.818,-6.895 40.818,1.615 40.251,2.185
CPDGND on Bottom Layer "Bottom=DPGND" (solid, remove dead copper, pour order 1014): 39.65,-1.128 39.65,-11.813 38.518,-12.946 38.518,-20.763 38.576,-20.821 38.658,-20.821 41.087,-23.25 45.966,-23.25 45.978,-23.238 46.011,-23.238 47.263,-21.986 47.263,-11.615 52.38,-6.498 52.38,-0.638 52.18,-0.438
DGND on Bottom Layer "Mid1=DGND" (solid, remove dead copper, pour order 1006): 50.913,-32.308 50.97,-32.288 57.249,-32.288 58.58,-31.828 58.58,-1.988 50.71,-1.988
DRFGND on Bottom Layer "Bottom=RFGND" (solid, remove dead copper, pour order 1015): 1.1,-17.332 9.47,-8.962 9.48,-8.962 9.62,-9.102 9.62,-15.462 16.44,-15.462 16.74,-15.762 16.74,-15.782 16.87,-15.912 16.87,-30.442 16.61,-30.702 0.95,-30.702 0.57,-30.322 0.55,-30.322 0.46,-30.232 0.46,-17.952
DRFGND on Bottom Layer "Mid1=DGND" (solid, remove dead copper, pour order 1005): 0.55,-20.684 0.46,-20.598 0.46,-3.498 0.48,-3.517 18.28,-3.517
DGND on Bottom Layer "Mid1=DGND" (solid, remove dead copper, pour order 1007): 16.87,-29.235 16.87,-33.728 19.73,-36.588 54.5,-36.588 58.72,-32.368 58.55,-32.198 58.55,-27.378
DGND on Bottom Layer "Bottom=DGND" (solid, remove dead copper, pour order 1016): 17.418,-1.724 9.764,-9.322 9.764,-15.301 16.584,-15.301 16.584,-15.321 17.014,-15.748 17.014,-30.199 17.234,-30.417 18.114,-30.417 21.294,-33.574 40.254,-33.574 43.484,-30.367 55.794,-30.367 56.114,-30.05 56.114,-3.962 55.664,-3.515 55.624,-3.476 41.803,-3.476 41.305,-3.97 41.305,-6.987 38.611,-9.662 34.472,-9.662 30.68,-13.52 28.771,-13.517 27.465,-14.816 26.025,-16.231 24.01,-16.226 22.093,-18.129 20.744,-18.129 19.114,-16.511 19.114,-13.75 19.117,-9.594 18.335,-8.844 17.375,-7.891
ADCGND on Bottom Layer "Bottom=AGND" (solid, remove dead copper, pour order 1017): 17.42,-0.088 17.42,-7.908 19.275,-9.795 19.275,-16.692 20.896,-18.343 22.224,-18.343 24.179,-16.358 25.898,-16.358 28.307,-13.911 30.055,-13.911 34.246,-9.654 38.709,-9.654 39.89,-8.455 39.89,2.382

## Keep-outs
Keep-Out Layer:
  lines w1: 0.63,-31.448 17.822,-31.448 ; 0.64,-31.438 0,-30.798 0,-16.581 0,-3.938 0.89,-3.048 15.189,-3.048 18.239,-0.008 37.87,-0.008 40.901,-3.039 55.931,-3.039 ; 17.822,-31.448 20.84,-34.478 ; 20.84,-34.488 40.29,-34.488 ; 40.3,-34.488 43.334,-31.442 ; 43.334,-31.448 56.03,-31.448 ; 55.94,-3.048 56.7,-3.808 56.7,-30.788 56.035,-31.453
Mechanical 1:
  lines w0.2: 0,-18.208 0.029,-18.208

## Other copper
Top Layer:
  region net D+3V: 17.592,-13.704 18.181,-14.293 16.906,-14.293 16.906,-14.169 17.371,-13.704
  pour cut-out: 18.274,-21.663 17.026,-21.662 17.002,-21.638 17.002,-21.228 18.01,-21.237 18.614,-21.237 18.614,-22.709 18.269,-22.712
  pour cut-out: 8.877,-16.491 9.377,-16.491 9.377,-16.388 12.19,-16.388 12.78,-16.853 12.78,-17.188 12.77,-17.188 12.44,-17.518 8.869,-17.567
  pour cut-out: 7.805,-8.413 7.86,-19.391 7.981,-19.27 8.861,-19.27 8.861,-18.644 8.877,-16.491 8.878,-16.278 8.88,-15.859 8.892,-14.881 8.881,-13.647 8.889,-12.31 8.9,-10.976 9.146,-10.989 9.154,-9.715 9.162,-8.921 8.635,-8.402
  pour cut-out: 23.716,-9.689 24.358,-9.047 25.456,-10.145 25.456,-10.172 24.833,-10.809
  pour cut-out: 5.519,-12.67 7.998,-12.67 7.998,-16.573 8.09,-16.665 7.999,-16.756 5.749,-16.756
  pour cut-out: 4.445,-11.442 4.502,-11.499 5.754,-11.499 5.754,-18.772 5.86,-18.878 5.803,-18.935 4.445,-18.935
  pour cut-out: 36.344,-16.717 36.394,-16.667 39.099,-16.667 39.452,-17.02 39.452,-19.284 38.934,-19.802 38.682,-19.55 38.615,-19.616 38.031,-19.616 37.808,-19.839 37.757,-19.839 37.584,-19.666 36.647,-19.666
  pour cut-out: 23.562,-13.974 23.615,-13.972 23.612,-11.523 23.612,-11.503 24.468,-11.503 24.469,-11.502 24.469,-13.972 24.471,-13.974 24.591,-13.974 24.581,-13.964 24.581,-11.367 24.562,-11.386 23.438,-11.386 23.438,-13.971 23.441,-13.974
  pour cut-out: 49.61,-11.404 49.645,-11.369 50.538,-11.369 50.538,-20.631 50.375,-20.794 50.376,-20.794 50.54,-20.63 50.54,-20.782 50.528,-20.77 49.555,-20.77
  pour cut-out: 3.21,-18.89 3.222,-18.878 5.17,-19.188 5.72,-19.238 5.719,-20.317 6.003,-20.306 6,-19.242 7.721,-19.213 7.724,-20.323 8.003,-20.323 7.999,-19.212 9.11,-19.168 11.02,-18.878 11.02,-26.718 10.99,-26.748 7.13,-26.738 5.36,-26.218 3.27,-26.218
  pour cut-out: 42.38,-10.155 42.538,-10.32 42.544,-11.153 42.54,-12.196 44.237,-12.2 43.907,-14.55 43.209,-14.551 43.102,-15.437 42.919,-15.437 42.391,-15.408 42.384,-14.41 41.3,-14.396 40.957,-14.742 40.956,-15.142 40.955,-15.875 40.512,-16.318 40.47,-16.664 40.836,-16.662 41.747,-15.754 41.851,-16.326 41.518,-16.955 39.85,-16.95 39.849,-15.797 39.849,-14.289 39.676,-14.117 39.392,-14.117 39.392,-14.11 39.291,-14.009 39.291,-12.859 40.531,-11.619 40.523,-9.947 41.533,-9.952 42.038,-9.955
  pour cut-out: 33.92,-10.998 35.6,-10.998 35.726,-10.997 36.097,-10.998 36.087,-11.05 35.832,-11.05 35.753,-11.124 35.6,-11.268 35.6,-11.768 35.993,-12.161 34.224,-12.171 33.927,-11.875
  pour cut-out: 47.86,-15.518 50.39,-15.518 50.39,-16.239 50.281,-16.348 47.79,-16.348
  pour cut-out: 14,-25.498 15.64,-25.498 15.64,-26.348 14.01,-26.348 13.99,-26.368
  pour cut-out: 13.544,-17.619 14.104,-17.619 14.05,-17.673 14.05,-21.923 14.044,-21.929 13.384,-21.929
  pour cut-out: 33.42,-11.07 30.09,-11.495 30.091,-9.942 29.97,-9.768 30.918,-9.768 30.948,-9.477 33.043,-9.461 33.053,-8.816 35.77,-8.718 35.767,-8.942 35.957,-9.168 35.988,-10.219 33.927,-10.361 33.927,-11.875 33.87,-11.818 33.42,-11.818
  pour cut-out: 12.78,-16.853 12.88,-16.938 15.674,-16.932 15.68,-16.938 15.67,-18.128 15.45,-18.128 15.45,-19.528 15.69,-19.528 15.68,-20.118 15.45,-20.118 15.45,-21.518 15.68,-21.518 15.68,-23.821 15.64,-25.66 15.64,-23.86 13.932,-23.86 13.89,-23.818 13.56,-17.078 12.78,-17.078
  pour cut-out: 10.27,-25.638 12.38,-25.638 12.42,-25.678 12.42,-28.038 12.48,-28.098 10.22,-28.098 10.17,-28.148
  pour cut-out: 44.71,-16.408 45.19,-16.408 45.21,-16.428 45.16,-17.642 45.11,-17.458 44.81,-17.458 44.76,-17.642
  pour cut-out: 42.31,-17.468 42.35,-17.508 42.35,-21.198 40.82,-21.198 40.816,-21.202 40.816,-21.394 42.256,-22.833 46.665,-22.833 47.559,-21.939 47.559,-21.394 46.411,-21.394 46.41,-21.392 46.41,-17.618 45.185,-17.618 45.16,-17.642 45.16,-18.028 45.07,-18.118 44.85,-18.118 44.77,-18.038 44.77,-18.008 44.76,-17.998 44.76,-17.468
  pour cut-out: 1.973,-19.223 1.973,-19.5 2.144,-19.5 2.154,-20.686 2.09,-20.801 1.792,-20.802 1.79,-20.9 1.792,-21.055 1.95,-21.055 3.125,-21.055 3.14,-21.04 3.14,-19.233 3.21,-19.163
  pour cut-out: 31.205,-10.968 33.43,-10.973 33.44,-10.911 33.44,-11.741 33.334,-11.635 30.538,-11.635
  pour cut-out: 2.22,-17.763 12.144,-7.839 12.145,-7.839 14.909,-5.075 2.241,-5.075 2.219,-5.053
  pour cut-out: 44.4,-14.1 45.006,-14.1 45.154,-13.952 45.154,-13.265 45.312,-13.265 45.494,-13.447 45.494,-14.858 45.399,-14.953 44.4,-14.953 44.273,-14.826 44.272,-13.973
  pour cut-out: 40.88,-6.678 42.169,-6.678 42.848,-7.357 44.319,-7.357 44.319,-5.706 44.195,-5.582 41.685,-5.583 40.881,-6.552
MidLayer1:
  pour cut-out: 0.656,-16.214 10.579,-6.29 10.58,-6.29 13.344,-3.526 0.676,-3.526 0.654,-3.504
MidLayer2:
  region net CPD+3.3V: 42.226,-12.468 41.496,-12.468 41.896,-12.068 41.9,-12.068
  pour cut-out: 0.656,-16.213 10.58,-6.289 13.345,-3.525 0.676,-3.525 0.654,-3.503
  region net USB+5V: 34.359,-4.753 34.39,-5.018 35.139,-5.888 34.367,-5.888
  region net USB+5V: 34.359,-4.753 34.328,-5.018 33.579,-5.888 34.351,-5.888
Bottom Layer:
  pour cut-out: 0.656,-16.214 10.579,-6.29 10.58,-6.29 13.344,-3.526 0.676,-3.526 0.654,-3.504

## Silkscreen, mask and mechanical layers (free items; w line width, h text height)
Top Overlay:
  circle w0.2: c26.949,-6.734 r0.532
  circle w0.4: c26.95,-6.734 r0.044
  lines w0.15: 0.54,-15.869 10.455,-5.953
  lines w0.2: 26.579,-8.825 26.58,-8.824 27.189,-8.824 ; 26.647,-8.991 26.651,-8.988 27.253,-8.988 ; 26.716,-9.16 26.718,-9.162 27.183,-9.162 ; 26.949,-7.274 26.949,-9.734 ; 27.499,-6.734 29.949,-6.734 ; 29.049,-7.101 29.049,-6.371 29.051,-6.368 ; 29.205,-7.037 29.205,-6.432 29.206,-6.431 ; 29.345,-6.98 29.345,-6.491 29.347,-6.489 ; 26.949,-9.734 26.509,-8.654 27.389,-8.654 26.949,-9.734 ; 29.949,-6.734 28.869,-6.294 28.869,-7.174 29.949,-6.734
  lines w0.3: 47.387,-16.402 ccw(c47.345,-16.525) 47.426,-16.423
  text "LEDs" at 9.537,-4.388 h1.2
  text "123" at 9.537,-5.468 h1.2
  text "JP1A" at 39.488,-6.176 h1 r90
  text "Y" at 30.453,-7.192 h1
  text "Z" at 25.268,-7.656 h1
  text "X" at 27.895,-8.716 h1
  text "Gnd" at 19.957,-11.178 h1.5
  text "Z1" at 2.078,-13.593 h4.5 r45
  text "LEDs 45" at 47.282,-13.893 h1.2
  text "JP1D" at 32.027,-16.07 h0.8
  text "JP1B" at 50.613,-23.955 h1 r90
  text "V+3" at 19.404,-26.609 h1.5
  text "JP1C" at 21.385,-28.365 h1
  text "JP1E" at 45.381,-31.176 h0.5
Bottom Overlay:
  lines w0.2: 50.526,-7.597 50.526,-6.356 51.23,-5.652
  text "2" at 17.979,-2.355 h0.8
  text "16" at 39.314,-2.749 h0.8
  text "15" at 39.29,-4.605 h0.8
  text "1" at 17.782,-4.98 h0.8
  text "18" at 55.847,-4.983 h0.5 r270
  text ".VersionControl_RevNumber" at 3.022,-5.39 h2
  text "0938 -_______ Rev." at 15.925,-5.39 h2
  text "ANALOG" at 25.557,-7.882 h1
  text "JP1A" at 29.826,-7.882 h1
  text "17" at 50.373,-8.929 h0.8
  text "Z1" at 7.066,-9.549 h5
  text "rev.C" at 1.289,-9.626 h1.8 r270
  text "zolertia.com" at 13.088,-11.242 h1.5
  text "GND" at 17.564,-12.256 h1
  text "JTAG" at 38.212,-13.036 h0.8
  text "60" at 34.934,-13.575 h0.8
  text "67" at 40.119,-18.406 h0.8
  text "DIG. BUSES" at 50.006,-24.247 h0.8 r270
  text "JP1B" at 50.821,-26.843 h1
  text "+" at 24.674,-27.294 h2.5
  text "ICSP" at 47.179,-28.031 h0.5
  text "JP1C" at 40.918,-28.093 h1
  text "59" at 44.412,-28.121 h0.8
  text "55" at 49.506,-28.121 h0.8
  text "DIGITAL I/O" at 30.439,-28.754 h0.8
  text "53" at 20.046,-29.732 h0.8
  text "39" at 42.315,-30.005 h0.8
  text "38" at 55.942,-30.289 h0.5 r270
  text "37" at 49.945,-30.616 h0.8 r270
  text "40" at 42.334,-31.802 h0.8
  text "54" at 20.003,-31.817 h0.8
Top Paste:
  rectangle: 12.64,-12.978 16.56,-9.608
Top Solder:
  rectangle: 14.98,-7.668 15.54,-7.488
  rectangle: 13.98,-7.798 14.3,-7.488
  rectangle: 12.85,-7.278 13.67,-6.778
  rectangle: 12.44,-13.118 16.71,-9.508
  lines w0.8: 4.79,-13.068 1.03,-16.828 1.03,-30.038 16.25,-30.038 ; 9.21,-15.868 11.83,-15.868 16.34,-15.868 16.34,-20.133 16.34,-27.638 ; 9.21,-15.792 9.21,-13.003
Bottom Solder:
  lines w0.8: 4.79,-13.068 1.01,-16.848 1.01,-30.038 16.31,-30.038 ; 9.21,-15.868 11.83,-15.868 16.34,-15.868 16.34,-20.133 16.34,-30.008 ; 9.21,-15.792 9.21,-13.003
Mechanical 1:
  lines w0.2: 0.63,-31.448 17.822,-31.448 ; 0.64,-31.438 0,-30.798 0,-16.581 0,-3.938 0.89,-3.048 15.189,-3.048 18.239,-0.008 37.87,-0.008 40.901,-3.039 55.931,-3.039 ; 17.822,-31.448 20.84,-34.478 ; 20.84,-34.488 40.29,-34.488 ; 40.3,-34.488 43.334,-31.442 ; 43.334,-31.448 56.03,-31.448 ; 55.94,-3.048 56.7,-3.808 56.7,-30.788 56.035,-31.453
Mechanical 4:
  lines w0.1: 4.91,-15.539 5.78,-14.669 ; 6.01,-15.549 6.82,-14.739 6.83,-14.739 ; 6.77,-10.989 8.21,-12.429 8.21,-14.199 ; 7.21,-14.739 7.96,-15.489 7.97,-15.489

## Text inside footprints (layer, text, board x,y; h text height)
JP1: Top Overlay "1" at 34.88,-13.765 h0.5; Top Overlay "1" at 17.258,-5.28 h0.5